# Altium PCB MINI-STM32.PcbDoc
Units mil, origin at the board's own origin, x right, y up, seen from the top; angles counter-clockwise.
Board outline 3690.03 x 4351.02 mil, 3 copper layers (Top Layer, Mid-Layer 1, Bottom Layer); 19 components, 64 nets, 197 pads, 0 vias.
Unrouted connection lines stored in the file: 106.
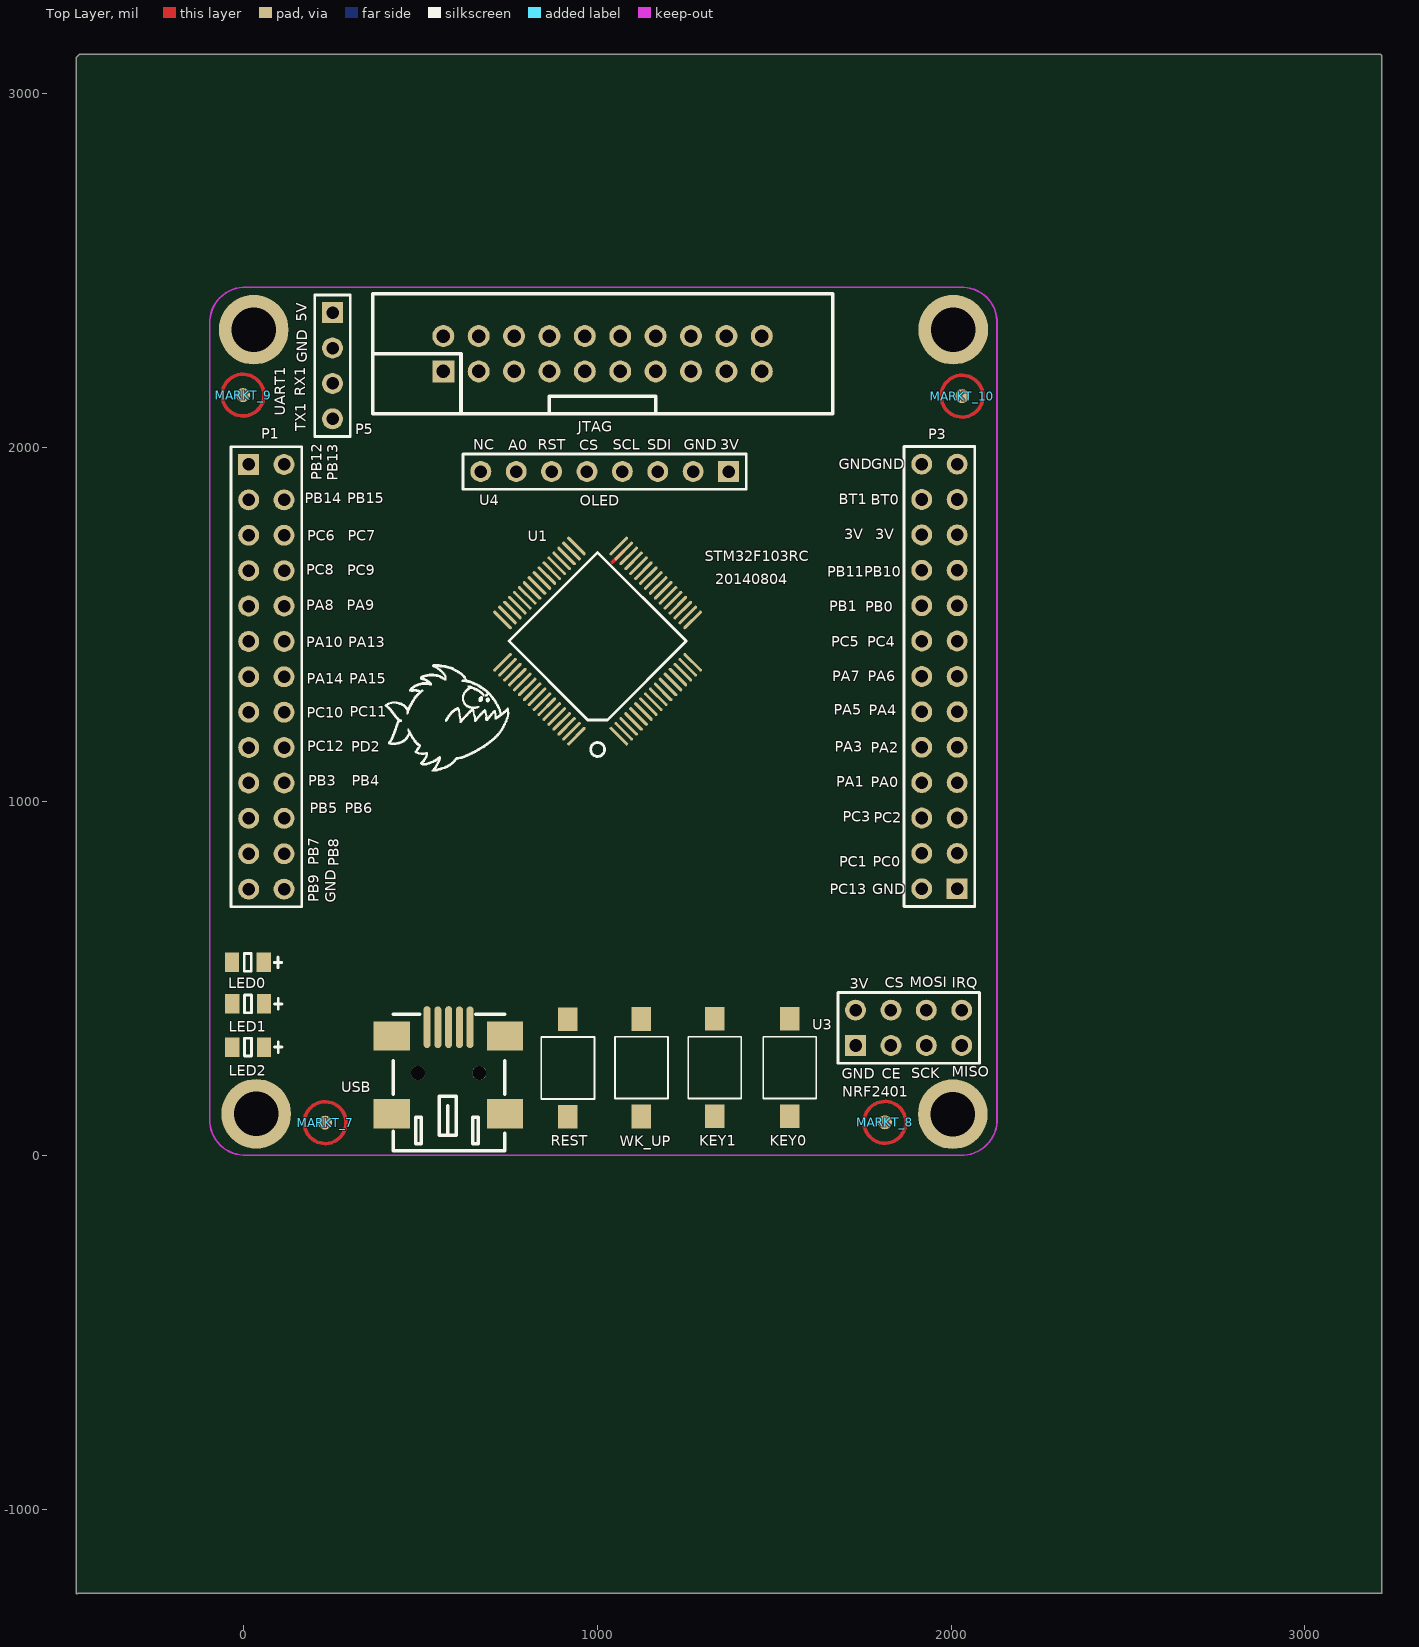
[diagram p0: Top Layer view]
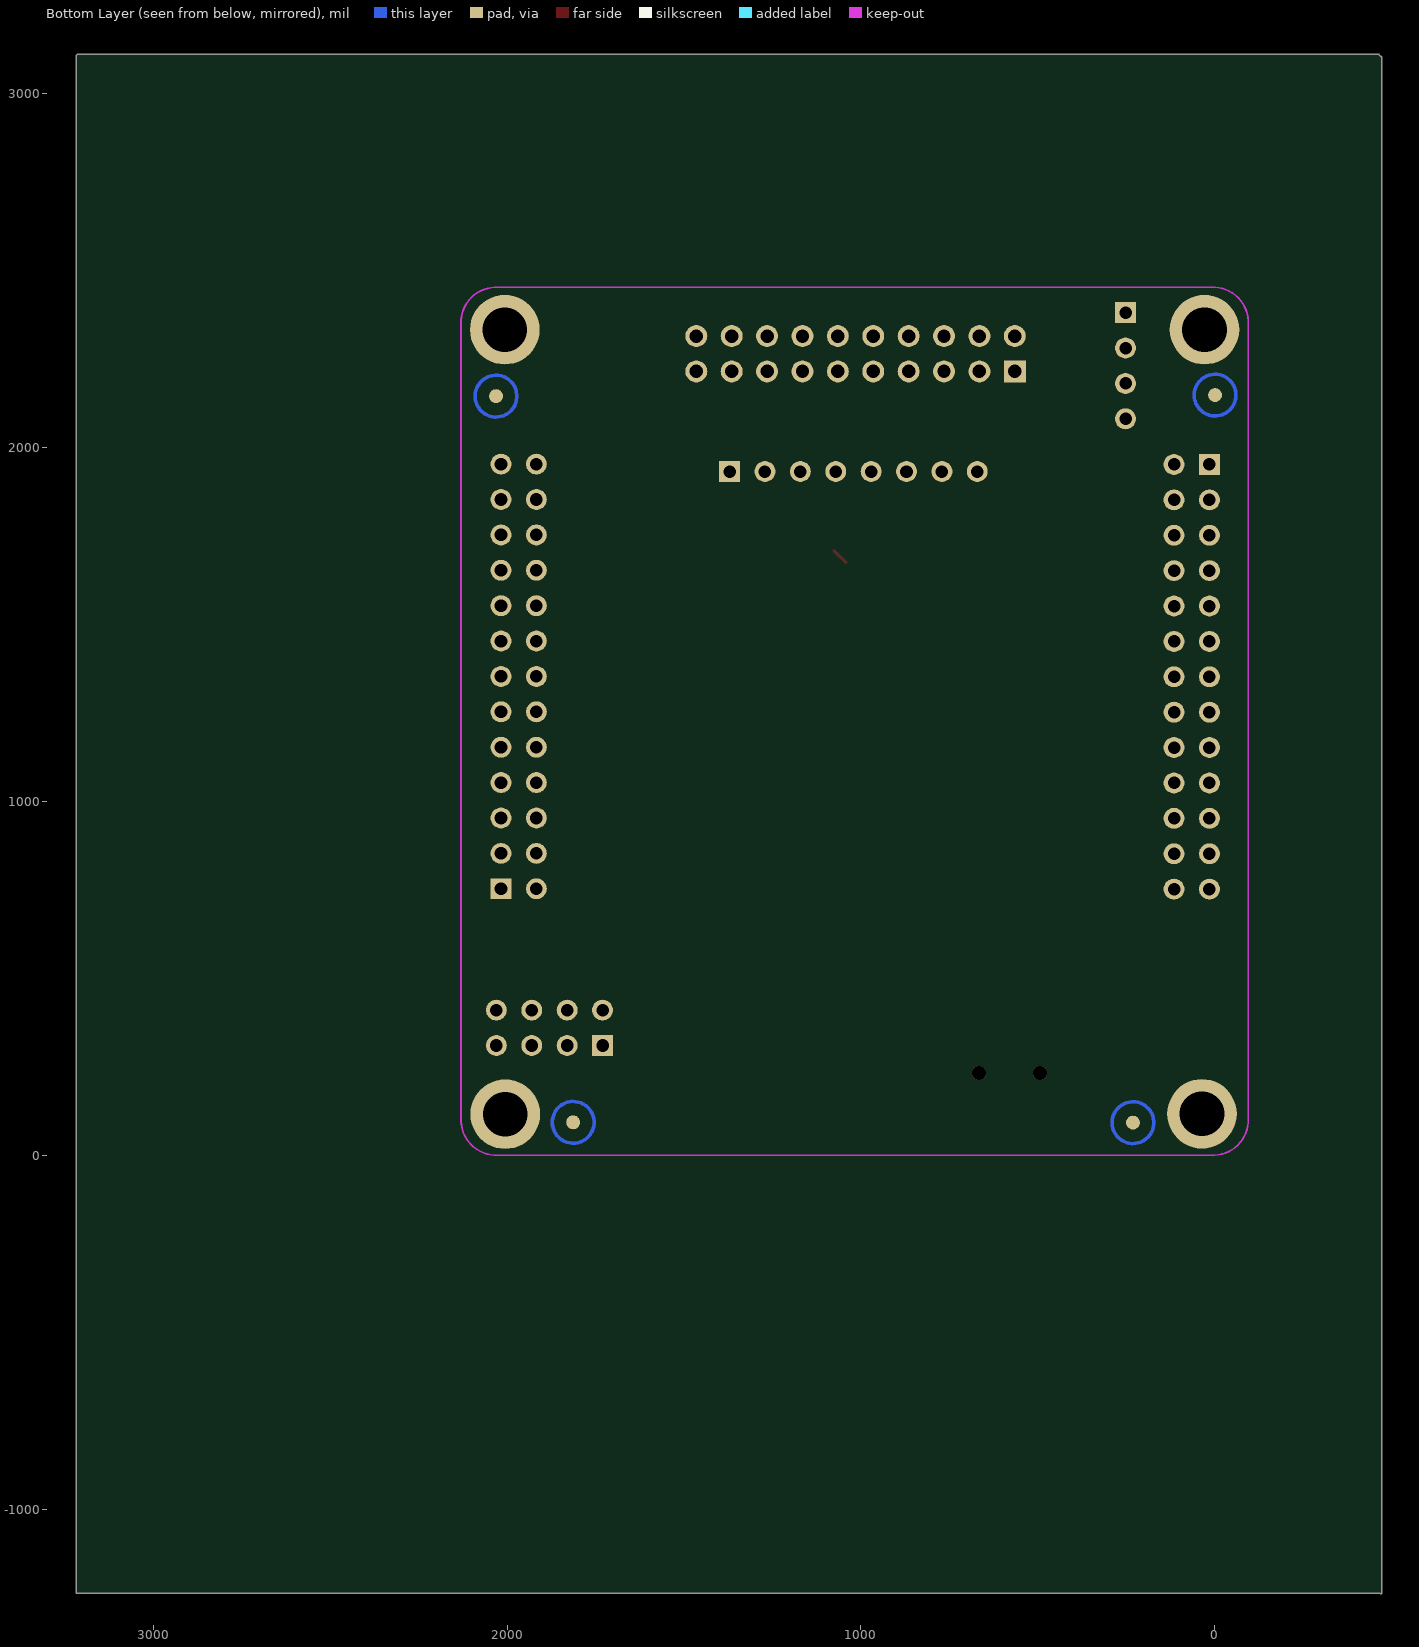
[diagram p1: Bottom Layer view, seen from below]

## Layer stack, top to bottom
Top Layer: signal copper 1.4
Dielectric: dielectric 12.6, FR-4, Dk 4.8
Mid-Layer 1: signal copper 1.4
Dielectric: dielectric 12.6, FR-4, Dk 4.8
Bottom Layer: signal copper 1.4

## Board outline
-472.52,-1237 -472.52,3101 cw(c-470,3101) -471.78,3102.78 -463.78,3110.78 cw(c-462,3109) -462,3111.52 3212,3111.52 cw(c3212,3109) 3213.78,3110.78 3216.78,3107.78 cw(c3215,3106) 3217.51,3106 3217.51,-1236 cw(c3215,-1236) 3215,-1238.51 -467.99,-1238.51 cw(c-470,-1237)

## Design rules (kind name [scope] priority, off if disabled: settings)
Clearance Clearance_2 [InNet( 'GND' ) And IsRegion] p1: gap=20
Clearance Clearance_1 [InComponent( 'U2' ) Or InComponent( 'U1' ) Or InComponent( 'J3' )] p2: gap=6
Clearance [All] p3: gap=8
FabricationTestpoint [(IsPad And (OnTopLayer Or OnBottomLayer))] p1: side=3 testpointundercomponent=TRUE minsize=40 maxsize=100 preferedsize=60 minholesize=0 maxholesize=40 preferedholesize=32 testpointgrid=1 allowsidetop=TRUE allowsidebottom=TRUE usegrid=TRUE gridtolerance=0.01
MinimumSolderMaskSliver [All] p1: minsoldermaskwidth=1
PolygonConnect PolygonConnect_1 [(InPadClass('All Pads'))] p1: connectstyle=Relief reliefconductorwidth=10 reliefentries=4 polygonreliefangle="90 Angle"
PolygonConnect [All] p2: connectstyle=Direct reliefconductorwidth=10 reliefentries=4 polygonreliefangle="90 Angle"
RoutingVias [All] p1: holewidth=28 width=50 viastyle="Through Hole" minholewidth=10 minwidth=10 maxholewidth=60 maxwidth=50
SilkToSilkClearance [All] p1: silktosilkclearance=1
SilkscreenOverComponentPads [All] p1: minsilkscreentomaskgap=1
SolderMaskExpansion [All] p1: expansion=4
Width [All] p1: maxlimit=50 minlimit=8 preferedwidth=10 midlayer1_minwidth=10 midlayer1_maxwidth=10 minimp=50.000000 maximp=50.000000 favimp=50.000000
24 further rules are at their usual default settings.

## Components (designator, comment, footprint, x,y, rotation, side; value= is the part's Value field where it differs from the comment)
JTAG "Header 10X2H" IDC20 565,2215 r0 top
KEY0 "Jumper" key4 1544,110 r90 top
KEY1 "Jumper" key4 1332,110 r90 top
LED0 "DS0" LED0805 57,545 r180 top
LED1 "DS1" LED0805 58,428 r180 top
LED2 "PWR" LED0805 58,306 r180 top
MARKT_7 "MARK" Mark 231,92 r90 top (schematic designator MARKT_2)
MARKT_8 "MARK" Mark 1813,93 r90 top (schematic designator MARKT_2)
MARKT_9 "MARK" Mark -1,2148 r90 top (schematic designator MARKT_2)
MARKT_10 "MARK" Mark 2031,2145 r90 top (schematic designator MARKT_2)
P1 "MHDR2X13" HDR2X13 15,1952 r270 top
P3 "MHDR2X13" HDR2X13 2017,753 r90 top
P5 "Header 4" HDR1X4 252,2381 r270 top
REST "Jumper" key4 917,384 r270 top
U1 "STM32F103RBT6" QFP64/P0.5/W12 1001,1453 r135 top
U3 "NRF2401" HDR2X4 1730,310 r0 top
U4 "TFT" HDR1X8 1371,1932 r180 top
USB "usb" MINUSB 519,362 r270 top
WK_UP "Jumper" key4 1125,385 r270 top

## Footprints (in the part's own frame and the unit in brackets; to place one, negate y for a bottom-side part, rotate by r counter-clockwise, add the part's x,y. Pads: shape width x height; smd on the part's side, far side on the other; paste and mask are expansions set on the pad)
HDR1X4 [mm] "Connector; Header; 4 Position"
  rect 1.5x1.5 hole 0.9: 1(0,0)
  round 1.5 hole 0.9: 2(2.54,0) 3(5.08,0) 4(7.62,0)
  silkscreen extent -1.27,-1.27 8.89,1.27
HDR1X8 [mm] "Connector; Header; 8 Position"
  rect 1.5x1.5 hole 0.9: 1(0,0)
  round 1.5 hole 0.9: 2(2.54,0) 3(5.08,0) 4(7.62,0) 5(10.16,0) 6(12.7,0) 7(15.24,0) 8(17.78,0)
  silkscreen extent -1.27,-1.27 19.05,1.27
HDR2X4 [mm] "Connector; Header; 4x2 Position"
  rect 1.5x1.5 hole 0.9: 1(0,0)
  round 1.5 hole 0.9: 2(0,2.54) 3(2.54,0) 4(2.54,2.54) 5(5.08,0) 6(5.08,2.54) 7(7.62,0) 8(7.62,2.54)
  silkscreen extent -1.27,-1.27 8.89,3.81
HDR2X13 [mm] "Connector; Header; 13x2 Position"
  rect 1.5x1.5 hole 0.9: 1(0,0)
  round 1.5 hole 0.9: 2(0,2.54) 3(2.54,0) 4(2.54,2.54) 5(5.08,0) 6(5.08,2.54) 7(7.62,0) 8(7.62,2.54) 9(10.16,0) 10(10.16,2.54) 11(12.7,0) 12(12.7,2.54) 13(15.24,0) 14(15.24,2.54) 15(17.78,0) 16(17.78,2.54) 17(20.32,0) 18(20.32,2.54) 19(22.86,0) 20(22.86,2.54) 21(25.4,0) 22(25.4,2.54) 23(27.94,0) 24(27.94,2.54) 25(30.48,0) 26(30.48,2.54)
  silkscreen extent -1.27,-1.27 31.75,3.81
IDC20 [mil]
  rect 62x62 hole 38: 1(0,0)
  round 62 hole 38: 2(0,100) 3(100,0) 4(100,100) 5(200,0) 6(200,100) 7(300,0) 8(300,100) 9(400,0) 10(400,100) 11(500,0) 12(500,100) 13(600,0) 14(600,100) 15(700,0) 16(700,100) 17(800,0) 18(800,100) 19(900,0) 20(900,100)
  silkscreen extent -200,-120 1100,220
key4 [mm]
  rect 1.7x1.4 smd: 1(0,0) 2(7,0)
  silkscreen extent 1.27,-1.91 5.71,1.91
LED0805 [mil]
  rect 40x55 smd: A(-0.38,0.28) K(89.62,0.28)
  silkscreen extent -51,-25 55,25
Mark [mm]
  round 1 all layers, no hole: 0(0,0)
  round 2.7 on Top Solder: 1(0,0)
  round 2.7 on Bottom Solder: 2(0,0)
  Top Layer circle w0.254: c0,0 r1.5
  Bottom Layer circle w0.254: c0,0 r1.5
MINUSB [mm]
  oval 3x0.5 smd: 1(0,0) 2(0.009,0.775) 3(0,1.549) 4(0.009,2.324) 5(0.009,3.086)
  rect 2.1x2.6 smd: ""(0.635,5.588) ""(0.635,-2.54) ""(6.223,5.588) ""(6.223,-2.54)
  round 1 hole 1: ""(3.299,3.749) ""(3.299,-0.651)
  silkscreen extent -0.94,-2.41 8.89,5.59
QFP64/P0.5/W12 [mm]
  rect 1.8x0.22 smd: 1(-5.904,3.752)
  oval 1.8x0.22 smd: 2(-5.904,3.252) 3(-5.904,2.752) 4(-5.904,2.252) 5(-5.904,1.752) 6(-5.904,1.252) 7(-5.904,0.752) 8(-5.904,0.252) 9(-5.904,-0.248) 10(-5.904,-0.748) 11(-5.904,-1.248) 12(-5.904,-1.748) 13(-5.904,-2.248) 14(-5.904,-2.748) 15(-5.904,-3.248) 16(-5.904,-3.748) 33(5.896,-3.748) 34(5.896,-3.248) 35(5.896,-2.748) 36(5.896,-2.248) 37(5.896,-1.748) 38(5.896,-1.248) 39(5.896,-0.748) 40(5.896,-0.248) 41(5.896,0.252) 42(5.896,0.752) 43(5.896,1.252) 44(5.896,1.752) 45(5.896,2.252) 46(5.896,2.752) 47(5.896,3.252) 48(5.896,3.752)
  oval 0.22x1.8 smd: 17(-3.754,-5.898) 18(-3.254,-5.898) 19(-2.754,-5.898) 20(-2.254,-5.898) 21(-1.754,-5.898) 22(-1.254,-5.898) 23(-0.754,-5.898) 24(-0.254,-5.898) 25(0.246,-5.898) 26(0.746,-5.898) 27(1.246,-5.898) 28(1.746,-5.898) 29(2.246,-5.898) 30(2.746,-5.898) 31(3.246,-5.898) 32(3.746,-5.898) 49(3.746,5.902) 50(3.246,5.902) 51(2.746,5.902) 52(2.246,5.902) 53(1.746,5.902) 54(1.246,5.902) 55(0.746,5.902) 56(0.246,5.902) 57(-0.254,5.902) 58(-0.754,5.902) 59(-1.254,5.902) 60(-1.754,5.902) 61(-2.254,5.902) 62(-2.754,5.902) 63(-3.254,5.902) 64(-3.754,5.902)
  silkscreen extent -6,-4.5 4.5,6

## Part data
JTAG: "Header, 10-Pin, Dual row, Right Angle"
KEY0 KEY1 REST WK_UP: "Jumper Wire"
LED0 LED1 LED2: library part LED
P1 P3: "Header, 13-Pin, Dual row"
P5: "Header, 4-Pin"
U3: library part "HEADER 8", "8 Pin Header"
U4: library part "Header 8", "Header, 8-Pin"

## Free pads (board coordinates)
  round 196.85 hole 125.98: 2(29,2333) 2(36,117) 2(2005,116) 2(2006,2333)

## Nets (pads, with @x,y where several pads share a name; then routed paths per layer and width w, separated by ;. In a path a pad name is that pad's centre, name@x,y a point inside that pad or via, vN(x,y) a via of type N, cw(c..) or ccw(c..) an arc to the next point about the centre after c; other vN are vias at no path point)
A0: P1.5 U1.37 U4.7
BOOT0: U1.60
BOOT1: U1.28
CS: P1.1 U1.33 U4.5
F_CS: P3.9 U1.16
GND: JTAG.4 JTAG.6 JTAG.8 JTAG.10 JTAG.12 JTAG.14 JTAG.16 JTAG.18 JTAG.20 KEY0.1 KEY1.1 LED2.K P1.26 P3.1 P3.25 P3.26 P5.2 REST.2 U1.12 U1.18 U1.31 U1.47 U1.63 U3.1 U4.2 USB.5 | length 45
  Top Layer w10: 1043,1675.74 U1.31
IIC_SCL: P1.17 U1.53
IIC_SDA: P1.16 U1.52
JTCK: JTAG.9 P1.13 U1.49
JTDI: JTAG.5 P1.14 U1.50
JTDO: JTAG.13 P1.19 U1.55
JTMS: JTAG.7 P1.12 U1.46
JTRST: JTAG.3 P1.20 U1.56
KEY0: KEY0.2 P3.4 U1.9
KEY1: KEY1.2 P3.2 U1.2
LCD_BL: P1.15 U1.51
LED0: LED0.K P1.9 U1.41
LED1: LED1.K P1.18 U1.54
NetF1_1: USB.1
NetLED0_A: LED0.A
NetLED1_A: LED1.A
NetLED2_A: LED2.A
NetP3_23: P3.23
NetP3_24: P3.24
NetR21_1: USB.2
NetR22_1: USB.3
NRF_CE: P3.11 U1.20 U3.3
NRF_CS: P3.15 U1.24 U3.4
NRF_IRQ: P3.16 U1.25 U3.8
OSC_IN1: U1.3
OSC_IN2: U1.5
OSC_OUT1: U1.4
OSC_OUT2: U1.6
PA0: P3.7 U1.14 WK_UP.2
PA1: P3.8 U1.15
PA3: P3.10 U1.17
PA5: P3.12 U1.21 U3.5
PA6: P3.13 U1.22 U3.7
PA7: P3.14 U1.23 U3.6
PA9: P1.10 P5.4 U1.42
PA10: P1.11 P5.3 U1.43
PA11: U1.44
PA12: U1.45
PB0: P3.17 U1.26
PB1: P3.18 U1.27
PB5: P1.21 U1.57
PB6: P1.22 U1.58
PB7: P1.23 U1.59
PB8: P1.24 U1.61
PB9: P1.25 U1.62
PB10: P3.19 U1.29
PB11: P3.20 U1.30
PB13: P1.2 U1.34 U4.4
PB14: P1.3 U1.35
PB15: P1.4 U1.36 U4.3
PC0: P3.3 U1.8
PC2: P3.5 U1.10
PC3: P3.6 U1.11
PC7: P1.6 U1.38
PC8: P1.7 U1.39
PC9: P1.8 U1.40
RESET: JTAG.15 REST.1 U1.7 U4.6
VCC3.3: JTAG.1 JTAG.2 P3.21 P3.22 U1.1 U1.13 U1.19 U1.32 U1.48 U1.64 U3.2 U4.1 WK_UP.1
VCC5: P5.1
pads on no net: JTAG.11 JTAG.17 JTAG.19 MARKT_7.0 MARKT_7.1 MARKT_7.2 MARKT_8.0 MARKT_8.1 MARKT_8.2 MARKT_9.0 MARKT_9.1 MARKT_9.2 MARKT_10.0 MARKT_10.1 MARKT_10.2 U4.8 USB. USB.4

## Keep-outs
Keep-Out Layer:
  lines w5: -95,103.73 -95,2357.85 ; -94.84,103.73 ccw(c4.45,99.29) 0,0 2026,0 ccw(c2030.44,99.29) 2129.73,94.84 ; -94.73,2357.85 cw(c4.56,2353.41) 9,2452.69 2035,2452.69 cw(c2030.55,2353.41) 2129.84,2348.96 ; 2130,94.84 2130,2348.96

## Silkscreen, mask and mechanical layers (free items; w line width, h text height)
Top Overlay:
  drawing of 1162 lines, arcs and shapes, not listed
  text "5V" at 179,2356 h30 r90
  text "GND" at 180,2240 h30 r90
  text "RX1" at 175,2145 h30 r90
  text "UART1" at 119,2089 h30 r90
  text "TX1" at 176,2046 h30 r90
  text "NC" at 650,1994 h30
  text "RST" at 832,1993 h30
  text "SCL" at 1044,1993 h30
  text "SDI" at 1141,1993 h30
  text "GND" at 1244,1993 h30
  text "3V" at 1347,1993 h30
  text "A0" at 748,1992 h30
  text "CS" at 949,1992 h30
  text "GND" at 1682,1939 h30
  text "GND" at 1774,1939 h30
  text "PB12" at 221,1907 h30 r90
  text "PB13" at 266,1906 h30 r90
  text "PB14" at 174,1843 h30
  text "PB15" at 294,1843 h30
  text "BT1" at 1683,1839 h30
  text "BT0" at 1773,1838 h30
  text "OLED" at 951,1835 h30
  text "3V" at 1698,1740 h30
  text "3V" at 1786,1740 h30
  text "PC6" at 180,1736 h30
  text "PC7" at 295,1736 h30
  text "STM32F103RC" at 1304,1678 h30
  text "PC8" at 178,1640 h30
  text "PC9" at 293,1639 h30
  text "PB11" at 1650,1635 h30
  text "PB10" at 1755,1635 h30
  text "20140804" at 1333,1614 h30
  text "PA8" at 177,1540 h30
  text "PA9" at 292,1540 h30
  text "PB1" at 1655,1537 h30
  text "PB0" at 1758,1536 h30
  text "PC5" at 1662,1437 h30
  text "PC4" at 1763,1437 h30
  text "PA10" at 177,1436 h30
  text "PA13" at 297,1436 h30
  text "PA7" at 1664,1339 h30
  text "PA6" at 1764,1339 h30
  text "PA14" at 179,1333 h30
  text "PA15" at 299,1332 h30
  text "PA5" at 1668,1245 h30
  text "PA4" at 1767,1243 h30
  text "PC11" at 300,1239 h30
  text "PC10" at 179,1236 h30
  text "PC12" at 180,1141 h30
  text "PD2" at 305,1140 h30
  text "PA3" at 1671,1140 h30
  text "PA2" at 1773,1138 h30
  text "PB3" at 184,1044 h30
  text "PB4" at 306,1044 h30
  text "PA1" at 1675,1041 h30
  text "PA0" at 1773,1040 h30
  text "PB5" at 187,966 h30
  text "PB6" at 286,966 h30
  text "PC3" at 1694,942 h30
  text "PC2" at 1782,940 h30
  text "PB7" at 213,819 h30 r90
  text "PB8" at 269,817 h30 r90
  text "PC1" at 1684,815 h30
  text "PC0" at 1778,815 h30
  text "GND" at 1777,738 h30
  text "PC13" at 1657,737 h30
  text "PB9" at 213,715 h30 r90
  text "GND" at 261,714 h30 r90
  text "MOSI" at 1883,474 h30
  text "CS" at 1813,473 h30
  text "IRQ" at 2002,473 h30
  text "3V" at 1714,470 h30
  text "MISO" at 2002,222 h30
  text "SCK" at 1888,218 h30
  text "GND" at 1691,216 h30
  text "CE" at 1804,216 h30
  text "NRF2401" at 1692,165 h30

## Dimensions
-95,103.73 to 2130,94.84 on Top Overlay
2035,2452.69 to 2026,0 on Top Overlay